# Altium PCB AioJig.PcbDoc
Units mm, origin at the board's own origin, x right, y up, seen from the top; angles counter-clockwise.
Board outline 65 x 20 mm, 2 copper layers (Top Layer, Bottom Layer); 12 components, 6 nets, 40 pads, 2 vias.
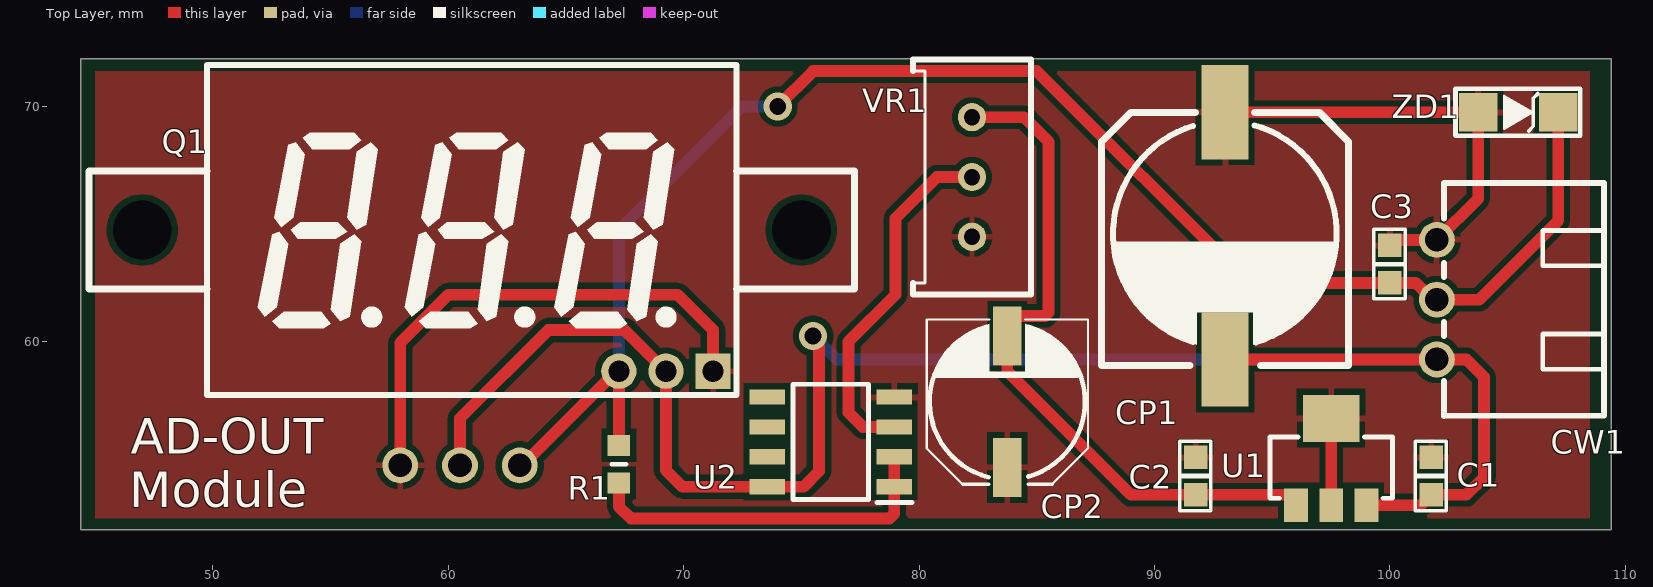
[diagram p0: Top Layer view]
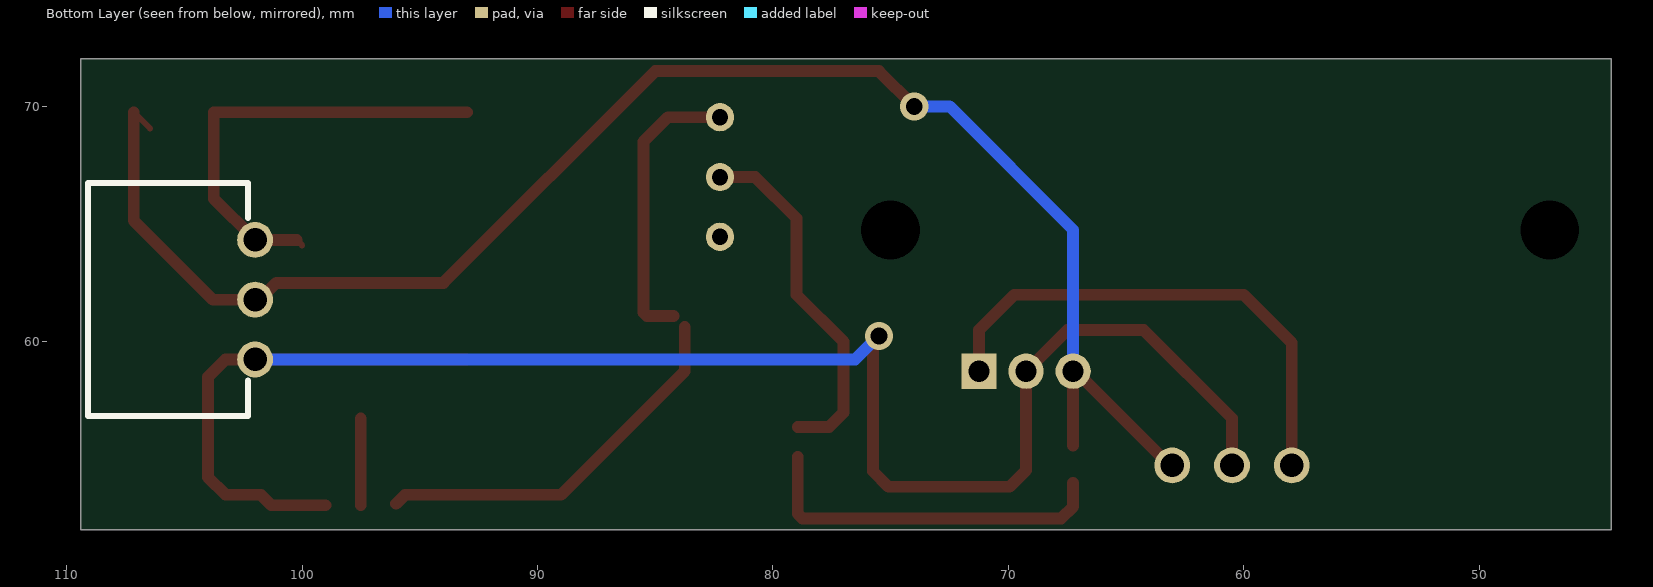
[diagram p1: Bottom Layer view, seen from below]
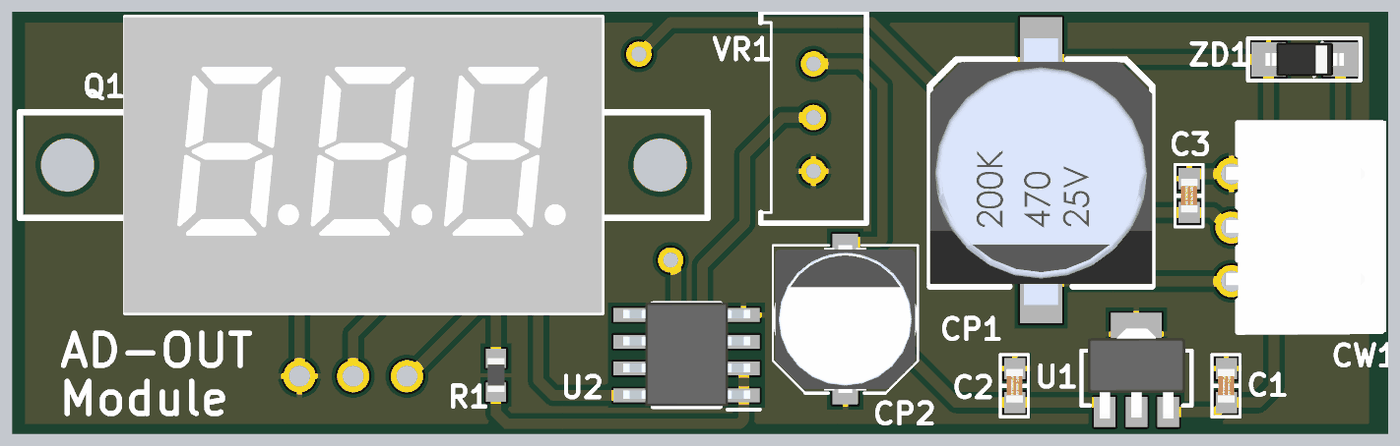
[diagram p2: 3D render of the assembled board from above, using the file's embedded part models]

## Layer stack, top to bottom
Top Solder: solder mask 0.0102, Solder Resist, Dk 3.5
Top Layer: signal copper 0.0356
Dielectric 1: dielectric 0.32, FR-4, Dk 4.8
Bottom Layer: signal copper 0.0356
Bottom Solder: solder mask 0.0102, Solder Resist, Dk 3.5

## Board outline
44.397,52.017 109.397,52.017 109.397,72.017 44.397,72.017

## Design rules (kind name [scope] priority, off if disabled: settings)
Clearance "Schematic Clearance Constraint_5" [InNet('Vout')] p1: gap=0.254 ignorepadtopadclearanceinfootprint=FALSE except(0: Arc-Hole Track-Hole SMDPad-Hole THPad-Hole Via-Hole Fill-Hole Poly-Hole Region-Hole Text-Hole)
Clearance "Schematic Clearance Constraint_4" [InNet('NetR1_2')] p2: gap=0.254 ignorepadtopadclearanceinfootprint=FALSE except(0: Arc-Hole Track-Hole SMDPad-Hole THPad-Hole Via-Hole Fill-Hole Poly-Hole Region-Hole Text-Hole)
Clearance "Schematic Clearance Constraint_3" [InNet('+24')] p3: gap=0.254 ignorepadtopadclearanceinfootprint=FALSE except(0: Arc-Hole Track-Hole SMDPad-Hole THPad-Hole Via-Hole Fill-Hole Poly-Hole Region-Hole Text-Hole)
Clearance "Schematic Clearance Constraint_2" [InNet('GND')] p4: gap=0.254 ignorepadtopadclearanceinfootprint=FALSE except(0: Arc-Hole Track-Hole SMDPad-Hole THPad-Hole Via-Hole Fill-Hole Poly-Hole Region-Hole Text-Hole)
Clearance "Schematic Clearance Constraint_1" [InNet('+5')] p5: gap=0.254 ignorepadtopadclearanceinfootprint=FALSE except(0: Arc-Hole Track-Hole SMDPad-Hole THPad-Hole Via-Hole Fill-Hole Poly-Hole Region-Hole Text-Hole)
Clearance "Schematic Clearance Constraint" [InNet('NetU2_3')] p6: gap=0.254 ignorepadtopadclearanceinfootprint=FALSE except(0: Arc-Hole Track-Hole SMDPad-Hole THPad-Hole Via-Hole Fill-Hole Poly-Hole Region-Hole Text-Hole)
Clearance [All] p7: gap=0.254 ignorepadtopadclearanceinfootprint=FALSE except(0: Arc-Hole Track-Hole SMDPad-Hole THPad-Hole Via-Hole Fill-Hole Poly-Hole Region-Hole Text-Hole)
PolygonConnect [All] p1: connectstyle=Relief reliefconductorwidth=0.254 reliefentries=4 polygonreliefangle="90 Angle" airgapwidth=0.254
RoutingVias "Schematic Routing Via Style_5" [InNet('GND')] p1: holewidth=0.5 width=0.8 viastyle="Through Hole" minholewidth=0.3 minwidth=0.5 maxholewidth=0.8 maxwidth=1.2
RoutingVias "Schematic Routing Via Style_4" [InNet('+5')] p2: holewidth=0.5 width=0.8 viastyle="Through Hole" minholewidth=0.3 minwidth=0.5 maxholewidth=0.8 maxwidth=1.2
RoutingVias "Schematic Routing Via Style_3" [InNet('NetU2_3')] p3: holewidth=0.5 width=0.8 viastyle="Through Hole" minholewidth=0.3 minwidth=0.5 maxholewidth=0.8 maxwidth=1.2
RoutingVias "Schematic Routing Via Style_2" [InNet('Vout')] p4: holewidth=0.5 width=0.8 viastyle="Through Hole" minholewidth=0.3 minwidth=0.5 maxholewidth=0.8 maxwidth=1.2
RoutingVias "Schematic Routing Via Style_1" [InNet('NetR1_2')] p5: holewidth=0.5 width=0.8 viastyle="Through Hole" minholewidth=0.3 minwidth=0.5 maxholewidth=0.8 maxwidth=1.2
RoutingVias "Schematic Routing Via Style" [InNet('+24')] p6: holewidth=0.5 width=0.8 viastyle="Through Hole" minholewidth=0.3 minwidth=0.5 maxholewidth=0.8 maxwidth=1.2
RoutingVias [All] p7: holewidth=0.711 width=1.27 viastyle="Through Hole" minholewidth=0.711 minwidth=1.27 maxholewidth=0.711 maxwidth=1.27
SolderMaskExpansion [All] p1: expansion=0.102 istentingtop=FALSE
Width "Schematic Width Constraint_5" [InNet('GND')] p1: maxlimit=1 minlimit=0.3 preferedwidth=0.5
Width "Schematic Width Constraint_4" [InNet('+5')] p2: maxlimit=1 minlimit=0.3 preferedwidth=0.5
Width "Schematic Width Constraint_3" [InNet('NetU2_3')] p3: maxlimit=1 minlimit=0.3 preferedwidth=0.5
Width "Schematic Width Constraint_2" [InNet('Vout')] p4: maxlimit=1 minlimit=0.3 preferedwidth=0.5
Width "Schematic Width Constraint_1" [InNet('NetR1_2')] p5: maxlimit=1 minlimit=0.3 preferedwidth=0.5
Width "Schematic Width Constraint" [InNet('+24')] p6: maxlimit=1 minlimit=0.3 preferedwidth=0.5
Width [All] p7: maxlimit=0.254 minlimit=0.254 preferedwidth=0.254
30 further rules are at their usual default settings.

## Components (designator, comment, footprint, x,y, rotation, side; value= is the part's Value field where it differs from the comment)
C1 "CS0805" CC1608 101.75,55.1 r270 top
C2 "CS0805" CC1608 91.75,55.1 r270 top
C3 "CS0805" CC1608 100,64.1 r270 top
CP1 "CP8_16" CP10_SMT 93,59.5 r90 top
CP2 "CP8_16" CP6_SMT 83.75,60.25 r270 top
CW1 "SMW250-03L" SMW250-03L 102,59.25 r90 top
Q1 "SND-330B" VoltMeter 54.75,59.75 r0 top
R1 "CS" RESC1608X55N 67.25,54.8 r270 top value=100
U1 "78XX_SOT89" SOT-89 96.01,53.06 r0 top value=7805
U2 "NCV2904DR" SOIC127P600X175-8N 76.25,55.75 r180 top
VR1 "VR" VR3296 82.25,69.54 r270 top value=10k
ZD1 "ZD_3216" ZD3216M 103.75,69.75 r0 top value=5.1V/0.5A

## Footprints (in the part's own frame and the unit in brackets; to place one, negate y for a bottom-side part, rotate by r counter-clockwise, add the part's x,y. Pads: shape width x height; smd on the part's side, far side on the other; paste and mask are expansions set on the pad)
CC1608 [mm]
  rect 1x1 smd: 1(0,0) 2(1.6,0)
  silkscreen extent -0.67,-0.67 2.27,0.65, body extent 0,-0.4 1.6,0.4, height 0.8
CP6_SMT [mm]
  rect 2.5x1.2 smd: 1(0,0) 2(5.588,0)
  silkscreen extent -0.7,-3.43 6.3,3.43, body extent -0.7,-3.3 6.3,3.3, height 8
CP10_SMT [mm]
  rect 4x2 smd: 1(-0.25,0) 2(10.25,0)
  silkscreen extent -0.5,-5.25 10.25,5.25, body extent -1.37,-5.25 11.25,5.25, height 10.61
RESC1608X55N [mm]
  rect 0.9x0.95 smd: 1(-0.8,0) 2(0.8,0)
  silkscreen extent 0,-0.3 0,0.3, body extent -0.8,-0.4 0.8,0.4, height 0.45
SMW250-03L [mil]
  round 60 hole 39.37: 1(0,0) 2(100,0) 3(200,0)
  silkscreen extent -95,-280 295,-12, body extent -94,-287 299,12, height 260
SOIC127P600X175-8N [mm]
  rect 1.5x0.65 smd: 1(-2.7,1.905) 2(-2.7,0.635) 3(-2.7,-0.635) 4(-2.7,-1.905) 5(2.7,-1.905) 6(2.7,-0.635) 7(2.7,0.635) 8(2.7,1.905)
  silkscreen extent -3.45,-2.45 1.6,2.58, body extent -3,-2.48 3,2.42, height 1.75
SOT-89 [mm]
  rect 1.016x1.422 smd: 1(0,0) 2(1.5,0) 3(3,0)
  rect 2.4x2 smd: 2(1.49,3.69)
  silkscreen extent -1.1,0.3 4.1,2.9, body extent -0.8,-0.3 3.8,3.95, height 1.35
VoltMeter [mm]
  rect 1.5x1.5 hole 0.9: 1(16.5,-1)
  round 1.5 hole 0.9: 2(14.5,-1) 3(12.5,-1)
  round 0 hole 2.5: 4(-7.75,5) 5(20.25,5)
  silkscreen extent -10,-2 22.5,12, body extent -5.1,-2 17.5,12, height 7.2
VR3296 [mm]
  round 1.2 hole 0.7: 1(0,0) 2(2.54,0) 3(5.08,0)
  silkscreen extent -2.46,-2.5 7.54,2.5
ZD3216M [mil]
  rect 64x64 smd: 1(0,0) 2(133.86,0)
  silkscreen extent -38,-39 171,39, body extent -6,-31 140,31, height 45

## Part data
C1 C2 C3: library part CS_SMT, Part No.="{Part No}", Price={Price}, 규격=0.1uF
CP1 CP2: library part CP_SMT, Part No.={Value}, Price={Price}
  CP1: 규격=470uF/50V
  CP2: 규격=220uF/16V
CW1 VR1: Part No.="{Part No}", Price={Price}
  CW1: Name={Name}
Q1: library part VoltMeter, Part No.="{Part No}", Price={Price}
R1: library part R_SMT, Part No.="{Part No}", Price={Price}
U1: Part No.="LM78L05 KX", Price=63
U2: library part NCD2904, "Dual general-purpose operational amplifier", Arrow Part Number=LM2904DR, Manufacturer_Name="Texas Instruments", Mouser Part Number=595-LM2904DR, Part No.=LM358, Arrow Price/Stock=https://www.arrow.com/en/products/lm2904dr/texas-instruments?region=nac, Datasheet Link=http://www.ti.com/lit/gpn/lm2904, Geometry.Height=1.75mm, Mouser Price/Stock=https://www.mouser.co.uk/ProductDetail/Texas-Instruments/LM2904DR?qs=5BZzbFV4k2vkQqOl3Q8qPg%3D%3D, Price={Price}
ZD1: "24V/0.5A", Part No.="BZT52C24 / TCMMSZ5252BW", Price=17

## Free pads (board coordinates)
  round 1.524 hole 1: 1(57.96,54.75) 2(60.5,54.75) 3(63.04,54.75)

## Via types
v1: diameter 1.2, hole 0.711, Top Layer to Bottom Layer, 2 vias

## Nets (pads, with @x,y where several pads share a name; then routed paths per layer and width w, separated by ;. In a path a pad name is that pad's centre, name@x,y a point inside that pad or via, vN(x,y) a via of type N, cw(c..) or ccw(c..) an arc to the next point about the centre after c; other vN are vias at no path point)
+5: C2.2 CP2.1 U1.1 VR1.1 | length 28.8
  Top Layer w0.254: U1.1 U1.1@96.01,53.119
  Top Layer w0.5: VR1.1 84.46,69.54 85.5,68.5 85.5,61.25 85.351,61.101 CP2.1@84.223,61.101 ; CP2.1@83.75,60.628 83.75,58.75 89,53.5 C2.2 95.629,53.5 U1.1@96.01,53.119
+24: C1.2 CP1.1 CW1.1 pad.2 Q1.2 U1.3 U2.8 | length 78.1
  Top Layer w0.5: pad.2 60.5,56.75 64.25,60.5 67.5,60.5 Q1.2 69.25,54.544 69.949,53.845 U2.8 75.095,53.845 75.75,54.5 75.75,60 v1(75.5,60.25) ; CP1.1 CW1.1 103.25,59.25 104,58.5 104,54.25 103.25,53.5 C1.2 101.31,53.06 U1.3
  Bottom Layer w0.5: v1(75.5,60.25) 76.5,59.25 CW1.1
GND: C1.1 C2.1 C3.1 CP1.2 CP2.2 CW1.3 pad.1 Q1.1 U1.2 U2.4 VR1.3 ZD1.1 | length 44.4
  Top Layer w0.254: U1.2@97.5,56.75 U1.2@97.51,56.74 ; C3.1 C3.1@100.23,64.33
  Top Layer w0.5: pad.1 57.96,59.96 60,62 69.75,62 71.25,60.5 Q1.1 ; CP1.2 ZD1.1 103.75,66.08 CW1.3 C3.1@100.23,64.33 ; U1.2@97.51,53.06 U1.2@97.51,56.74
NetR1_2: R1.2 U2.1 U2.2 | length 15.4
  Top Layer w0.5: R1.2 67.25,53 67.75,52.5 78.75,52.5 78.95,52.7 U2.1 U2.2
NetU2_3: U2.3 VR1.2 | length 15.3
  Top Layer w0.5: U2.3 77.615,56.385 77,57 77,60 79,62 79,65.25 80.75,67 VR1.2
Vout: C3.2 CW1.2 pad.3 Q1.3 R1.1 ZD1.2 | length 68.7
  Top Layer w0.254: pad.3 pad.3@63.145,54.75 ; Q1.3@67.145,58.75 Q1.3 ; CW1.2@101.804,61.79 CW1.2 ; ZD1.2@106.464,69.064 ZD1.2
  Top Layer w0.5: pad.3@63.145,54.75 Q1.3@67.145,58.75 ; R1.1 Q1.3 ; v1(74,70) 75.5,71.5 85,71.5 94,62.5 C3.2 101.094,62.5 CW1.2@101.804,61.79 ; CW1.2 103.79,61.79 107.15,65.15 ZD1.2
  Bottom Layer w0.5: Q1.3 67.25,64.75 72.5,70 v1(74,70)
pads on no net: Q1.4 Q1.5 U2.5 U2.6 U2.7

## Polygon pours and split planes (outlines as drawn)
GND on Top Layer "NONET_L-01_P-001" (solid, pour order 0): 45,71.5 45,52.5 108.5,52.5 108.5,71.5

## Silkscreen, mask and mechanical layers (free items; w line width, h text height)
Top Overlay:
  text "AD-OUT" at 46.504,55.254 h1.52
  text "Module" at 46.457,52.972 h1.52
Drill Guide:
  the board outline again, w0.05